# Altium PCB otis_v3.PcbDoc
Units mil, origin at the board's own origin, x right, y up, seen from the top; angles counter-clockwise.
Board outline 2155 x 1100 mil, 2 copper layers (Top Layer, Bottom Layer); 16 components, 20 nets, 111 pads, 26 vias.
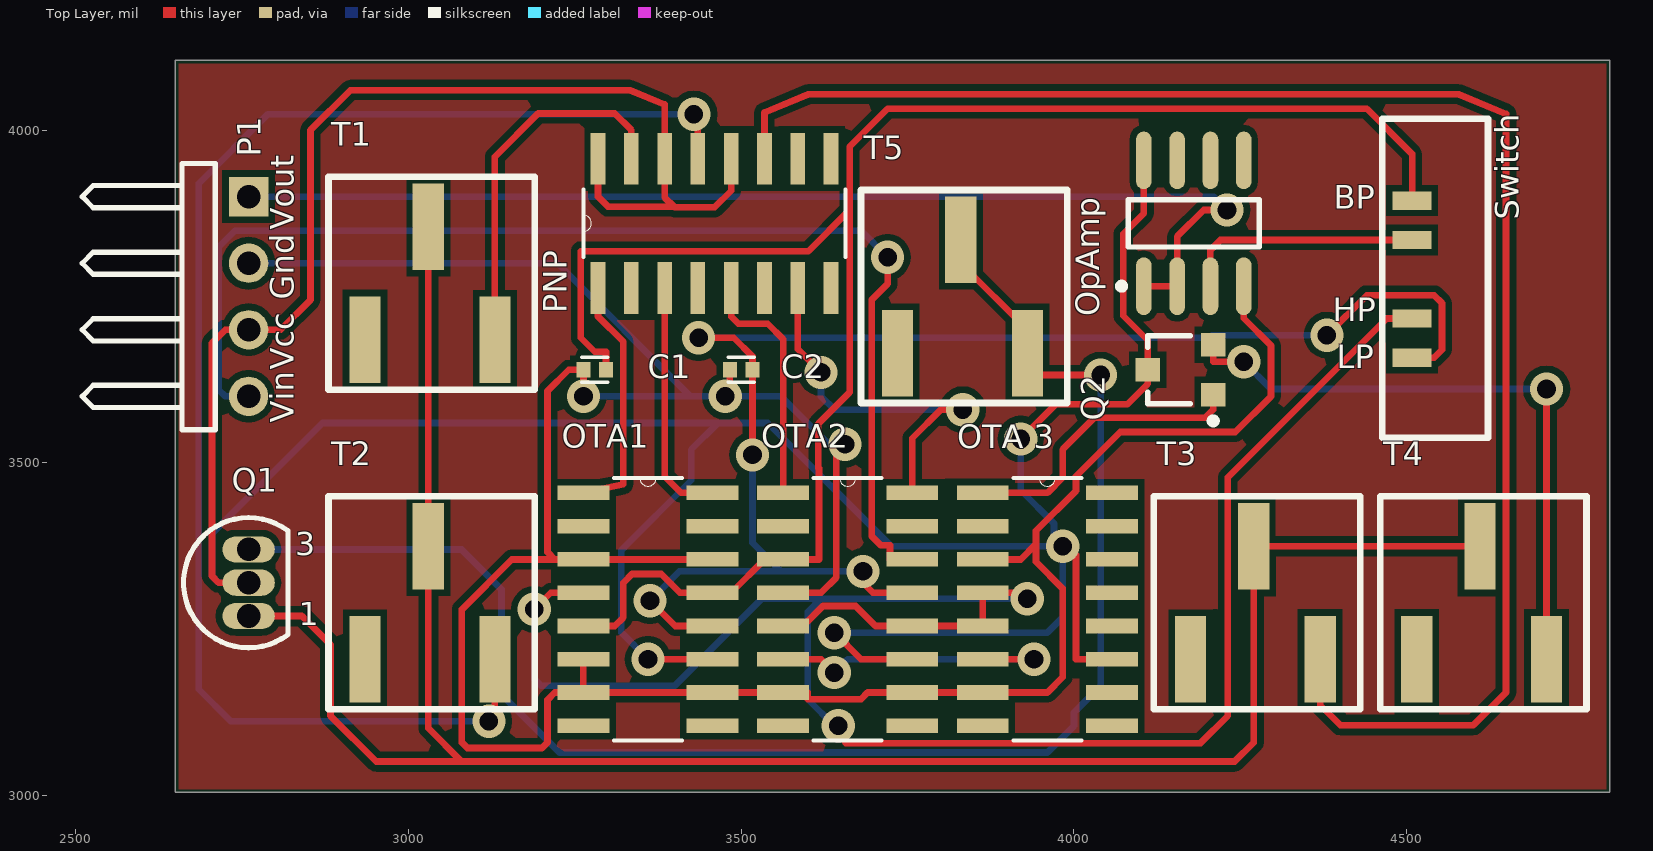
[diagram p0: Top Layer view]
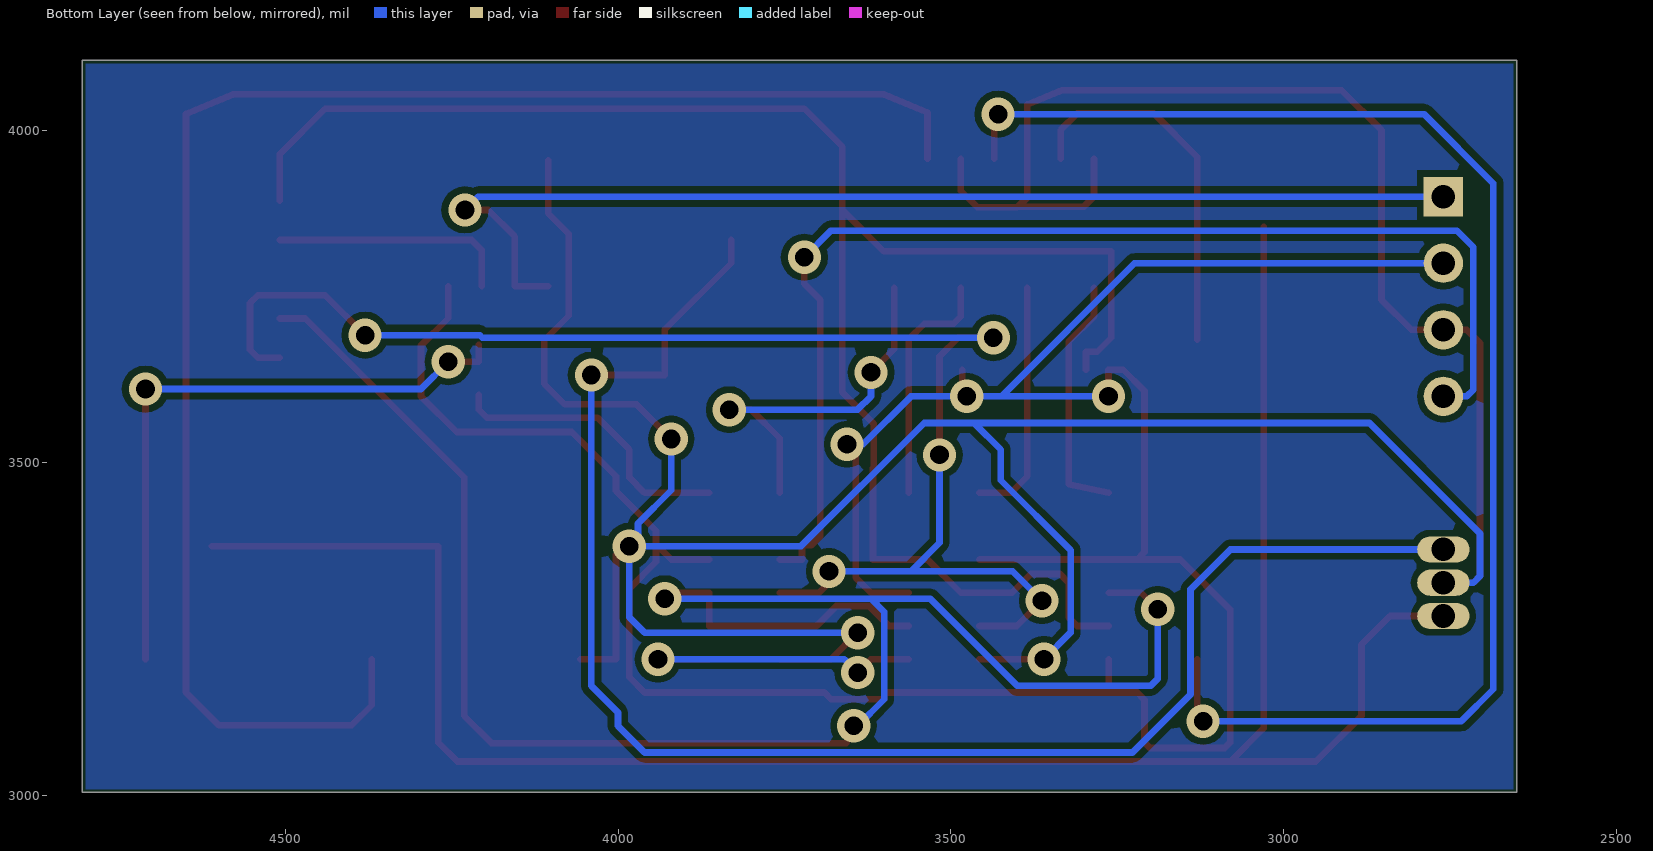
[diagram p1: Bottom Layer view, seen from below]

## Layer stack, top to bottom
Top Layer: signal copper 1.4
Dielectric: dielectric 12.6, FR-4, Dk 4.8
Bottom Layer: signal copper 1.4

## Board outline
2650,4105 4805,4105 4805,3005 2650,3005

## Design rules (kind name [scope] priority, off if disabled: settings)
Clearance [All] p1: gap=10
ComponentClearance [All] p1: gap=10 collisioncheckmode=3 verticalgap=10
PolygonConnect [All] p1: connectstyle=Relief reliefconductorwidth=10 reliefentries=4 polygonreliefangle="90 Angle"
RoutingVias [All] p1: holewidth=28 width=50 viastyle="Through Hole" minholewidth=28 minwidth=50 maxholewidth=28 maxwidth=50
SolderMaskExpansion [All] p1: expansion=4
TestPointUsage [All] p1: valid=0 allowmultiple=FALSE
Testpoint [All] p1: side=15 testpointundercomponent=TRUE minsize=40 maxsize=100 preferedsize=60 minholesize=0 maxholesize=40 preferedholesize=32 testpointgrid=1 style=1023 order=0-112345678
Width [All] p1: maxlimit=10 minlimit=10 preferedwidth=10
18 further rules are at their usual default settings.

## Components (designator, comment, footprint, x,y, rotation, side; value= is the part's Value field where it differs from the comment)
C1 "2pF" _C*CAPC1005X55N_CC0402C100K5GACAUTO_CPrimary_C 3280,3640 r0 top
C2 "2pF" _C*CAPC1005X55N_CC0402C100K5GACAUTO_CPrimary_C 3500,3640 r0 top
OpAmp "LF153D" SO8_N 4180,3860 r90 top (schematic designator U4)
OTA1 "LM13700M" LM13700LM13700MLM13700LM13700MLM13700PrimaryLM13700 3360,3280 r0 top
OTA2 "LM13700M" LM13700LM13700MLM13700LM13700MLM13700PrimaryLM13700 3660,3280 r0 top
"OTA 3" "LM13700M" LM13700LM13700MLM13700LM13700MLM13700PrimaryLM13700 3960,3280 r0 top
P1 "Header 4H" HDR1X4H 2760,3900 r270 top
PNP "MMPQ3906" LM13700LM13700MLM13700LM13700MLM13700PrimaryLM13700 3460,3860 r90 top
Q1 "2N3906" TO-92A 2760,3320 r0 top
Q2 "PNP" SOT-23B 4160,3640 r90 top
T1 "" PCBComponent_1#1 17400,31760 r0 top
T2 "" PCBComponent_1#1 17400,31280 r0 top
T3 "" PCBComponent_1#1 18640,31280 r0 top
T4 "" PCBComponent_1#1 18980,31280 r0 top
T5 "" PCBComponent_1#1 18200,31740 r0 top
? "Switch" PCBComponent_1#2 -28500,30605 r90 top

## Footprints (in the part's own frame and the unit in brackets; to place one, negate y for a bottom-side part, rotate by r counter-clockwise, add the part's x,y. Pads: shape width x height; smd on the part's side, far side on the other; paste and mask are expansions set on the pad)
_C*CAPC1005X55N_CC0402C100K5GACAUTO_CPrimary_C [mm]
  rect 0.54x0.6 smd: 1(-0.43,0) 2(0.43,0)
  silkscreen extent -0.5,-0.48 0.5,0.48
HDR1X4H [mm] "Connector; Header; 4 Position; Right Angle"
  rect 1.5x1.5 hole 0.9: 1(0,0)
  round 1.5 hole 0.9: 2(2.54,0) 3(5.08,0) 4(7.62,0)
  silkscreen extent -1.27,-6.35 8.89,-1.27
LM13700LM13700MLM13700LM13700MLM13700PrimaryLM13700 [mil]
  rect 78x22 smd: 1(-97,175) 2(-97,125) 3(-97,75) 4(-97,25) 5(-97,-25) 6(-97,-75) 7(-97,-125) 8(-97,-175) 9(97,-175) 10(97,-125) 11(97,-75) 12(97,-25) 13(97,25) 14(97,75) 15(97,125) 16(97,175)
  silkscreen extent -51,-197 51,197
PCBComponent_1#1 [mm]
  rect 1.19x3.3 smd: 1(-364.998,-708.787) 2(-367.411,-713.105) 3(-362.458,-713.105)
  silkscreen extent -368.81,-715.01 -360.93,-706.88
PCBComponent_1#2 [mm]
  rect 0.7x1.5 smd: 1(-684.454,-838.403) 2(-682.955,-838.403) 3(-679.958,-838.403) 4(-678.459,-838.403)
  round 0.9 on Top Solder: 8(-683.971,-840.054) 9(-678.942,-840.054)
  rect 1x0.8 on Top Paste: MP1(-686.587,-839.089) MP2(-686.587,-840.537) MP3(-676.25,-839.089) MP4(-676.25,-840.537)
  silkscreen extent -687.5,-841.3 -675.34,-837.26
SO8_N [mm] "SOIC, 8-Leads, Body 4.9x3.9mm, Pitch 1.27mm, IPC Medium Density"
  oval 2.2x0.6 smd: 1(-2.4,1.905) 2(-2.4,0.635) 3(-2.4,-0.635) 4(-2.4,-1.905) 5(2.4,-1.905) 6(2.4,-0.635) 7(2.4,0.635) 8(2.4,1.905)
  silkscreen extent -2.52,-2.5 0.9,2.88, body extent -1.95,-2.45 1.95,2.45, height 1.75
SOT-23B [mm] "SOT-23; 3 Leads; Body 3.0 x 2.6 mm, inc. leads (LxW max)"
  rect 0.9x0.95 smd: 1(-0.95,-1.25) 2(0.95,-1.25) 3(0,1.25)
  silkscreen extent -2.07,-1.38 1.3,1.25
TO-92A [mm] "TO, Flat Index; 3 In-Line, Axial Leads; Body Dia. 4.5mm; Leads 0.51 x 0.48 mm (max)"
  oval 2x1 hole 0.9: 1(0,-1.27) 2(0,0) 3(0,1.27)
  silkscreen extent -2.48,-2.48 1.5,2.48

## Part data
C1 C2: library part C0402C100K5GACAUTO, "CAPACITOR CERAMIC 10 PF 10% TOL 50V C0G 0402"
OpAmp: "Wide-Bandwidth Dual J-FET Operational Amplifier"
OTA1 OTA2 "OTA 3": "Dual Operational Transconductance Amplifier with Linearizing Diodes and Buffers 16-SOIC 0 to 70"
P1: "Header, 4-Pin, Right Angle"
PNP: library part LM13700M, "Dual Operational Transconductance Amplifier with Linearizing Diodes and Buffers 16-SOIC 0 to 70"
Q1: "PNP General Purpose Amplifier"
Q2: "PNP Bipolar Transistor"
T1 T2 T3 T4 T5 ?: library part Component_1

## Via types
v1: diameter 50, hole 28, Top Layer to Bottom Layer, 26 vias

## Nets (pads, with @x,y where several pads share a name; then routed paths per layer and width w, separated by ;. In a path a pad name is that pad's centre, name@x,y a point inside that pad or via, vN(x,y) a via of type N, cw(c..) or ccw(c..) an arc to the next point about the centre after c; other vN are vias at no path point)
BP: ?.4 C1.2 OTA1.5 OTA1.13 OTA2.3 | length 2689.6
  Top Layer w10: OTA1.5 3310,3255 3323,3268 3323,3320 3336,3333 3380,3333 3408,3305 OTA1.13 3485,3305 3535,3355 OTA2.3 3617,3355 3617,3492 3616,3492 3616,3559 3663,3606 3663,3880 ; C1.2 3296.93,3667 3280,3667 3259,3688 3259,3818 3601,3818 3663,3880 ; ?.4 4508,3964 4440,4032 3720,4032 3663,3975 3663,3880
COM: ?.3 OpAmp.3 | length 363.7
  Top Layer w10: OpAmp.3 4205,3820 4220,3835 ?.3
GND: "OTA 3.3" "OTA 3.7" C1.1 C2.1 OpAmp.4 OTA1.3 OTA1.6 OTA1.7 OTA1.10 OTA1.14 OTA2.4 OTA2.7 OTA2.10 P1.2 | length 4489.9
  Top Layer w10: OTA1.6 OTA1.7 ; v1(3263.07,3600) C1.1 3241,3640 3209,3608 3209,3366 3220,3355 ; OTA1.14 OTA1.3 3220,3355 ; v1(3476,3600) 3483.07,3607.07 C2.1 ; OTA2.4 3620,3305 3643,3328 3643,3515 v1(3656,3528) ; 3863,3355 3920,3355 3943,3378 ; OpAmp.4 4255,3717.25 4295.91,3676.34 4295.91,3600 4242.41,3546.5 4069.5,3546.5 4003,3480 4003,3458 3943,3398 3943,3378 ; 3220,3355 3155.31,3355 3080.31,3280 3080.31,3080 3088.64,3071.67 3200.67,3071.67 3209,3080 3209,3144 3220,3155 OTA1.7 ; OTA1.7 OTA1.10 OTA2.7 3600,3155 3600,3145 3680,3145 3690,3155 OTA2.10 3863,3155 3960,3155 3983,3178 3983,3311.56 3943,3351.56 3943,3378
  Bottom Layer w10: P1.2 3224,3800 3424,3600 ; v1(3263.07,3600) 3424,3600 ; v1(3656,3528) 3632,3528 3560,3600 v1(3476,3600) 3424,3600
HP: "OTA 3.4" "OTA 3.5" ?.2 OTA1.4 OTA2.5 OTA2.12 | length 3008.9
  Top Layer w10: v1(3189,3280) 3214,3305 OTA1.4 ; OTA2.5 3593,3255 3623,3285 3672,3285 3702,3255 OTA2.12 3863,3255 3863,3305 3921.08,3305 v1(3930,3296.08) ; v1(3646,3105) 3657,3079 4190,3079 4231,3120 4231,3478 4470,3717 ?.2
  Bottom Layer w10: v1(3189,3280) 3189,3176 3200,3165 3400,3165 3531.08,3296.08 3620,3296.08 ; v1(3646,3105) 3640,3105 3600,3145 3600,3276.08 3620,3296.08 ; v1(3930,3296.08) 3620,3296.08
LP: ?.1 C2.2 OTA1.12 OTA2.13 | length 2247
  Top Layer w10: v1(3363,3293) 3401,3255 OTA1.12 ; v1(3436,3688) 3488.93,3688 3516.93,3660 C2.2 v1(3516.93,3512) ; v1(3683,3337) 3683,3320 3698,3305 OTA2.13 ; v1(4380,3692) 4440,3752 4541,3752 4553,3740 4553,3670 4541,3658 ?.1
  Bottom Layer w10: v1(3363,3293) 3407,3337 3560,3337 ; v1(3436,3688) 4204,3688 4208,3692 v1(4380,3692) ; v1(3516.93,3512) 3516.93,3380.07 3560,3337 ; v1(3683,3337) 3560,3337
NetOpAmp_1: OpAmp.1 OpAmp.2 P1.1 | length 1694.3
  Top Layer w10: OpAmp.1 OpAmp.2 4155,3840 4195,3880 v1(4230,3880)
  Bottom Layer w10: P1.1 4210,3900 v1(4230,3880)
NetOTA1_1: OTA1.1 PNP.1 | length 372.1
  Top Layer w10: OTA1.1 3323,3468 3323,3682 3285,3720 PNP.1
NetOTA1_16: OTA1.16 PNP.3 | length 365.4
  Top Layer w10: PNP.3 3385,3480 3410,3455 OTA1.16
NetOTA2_1: OTA2.1 PNP.5 | length 366.1
  Top Layer w10: PNP.5 3485,3720 3496,3709 3540,3709 3563,3686 OTA2.1
NetOTA2_6: "OTA 3.6" OTA2.6 | length 470.6
  Top Layer w10: OTA2.6 3620,3205 v1(3640,3185) ; 3863,3205 v1(3940,3205)
  Bottom Layer w10: v1(3640,3185) 3660,3205 v1(3940,3205)
NetOTA2_16: OTA2.16 PNP.7 | length 574.6
  Top Layer w10: PNP.7 3585,3671 v1(3620,3636) ; OTA2.16 3757,3537 3800,3580 v1(3833,3580)
  Bottom Layer w10: v1(3620,3636) 3620,3600 3640,3580 v1(3833,3580)
"NetOTA 3_1": "OTA 3.1" Q2.1 | length 445.2
  Top Layer w10: 3863,3455 3960,3455 3983,3478 3983,3520 4031,3568 4197.21,3568 4209.21,3580 Q2.1
NetPNP_11: PNP.11 T3.3 | length 2444.9
  Top Layer w10: PNP.11 3535,4026.49 3601.13,4053.88 4577.88,4053.88 4649,4024.41 4649,3155 4600,3106 4400,3106 4370,3136 T3.3
NetPNP_13: PNP.13 T2.3 | length 2169.2
  Top Layer w10: v1(3121,3112) 3130,3121 T2.3 ; v1(3429,4024) 3435,4018 PNP.13
  Bottom Layer w10: v1(3121,3112) 2733,3112 2685,3160 2685,3920 2789,4024 v1(3429,4024)
NetPNP_15: PNP.15 T1.3 | length 560.3
  Top Layer w10: T1.3 3130,3960 3195,4025 3310,4025 3335,4000 PNP.15
NetQ1_1: Q1.1 T1.1 T2.1 T3.1 T4.1 | length 3134.5
  Top Layer w10: Q1.1 2840,3270 2883,3227 2883,3120 2951.66,3051.34 3080,3051.34 ; T1.1 T2.1 3030,3101.34 3080,3051.34 ; T4.1 T3.1 4270,3080 4241.34,3051.34 3080,3051.34
NetQ1_3: Q1.3 T5.1 T5.3 | length 2373.4
  Top Layer w10: T5.1 3830,3800 3930,3700 T5.3 3930,3632 v1(4040,3632)
  Bottom Layer w10: Q1.3 3080,3370 3140,3310 3140,3152.04 3227.04,3065 3960,3065 4000,3105 4000,3125 4040,3165 v1(4040,3632)
NetQ2_2: Q2.2 T4.3 | length 949.2
  Top Layer w10: Q2.2 4209.21,3652 v1(4255,3652) ; T4.3 v1(4710,3611)
  Bottom Layer w10: v1(4255,3652) 4296,3611 v1(4710,3611)
VCC: "OTA 3.11" OpAmp.8 OTA1.11 OTA2.11 P1.3 PNP.12 PNP.14 PNP.16 Q1.2 Q2.3 | length 5562
  Top Layer w10: Q1.2 2715,3320 2705,3330 2705,3680 2725,3700 P1.3 2808,3700 2853,3745 2853,4000 2913,4060 3333,4060 3385,4038.46 PNP.14 3385,3899 3399,3885 ; PNP.16 3285,3900 3300,3885 3399,3885 ; v1(3360,3205) OTA1.11 ; PNP.12 3485,3909 3460,3884 3400,3884 3399,3885 ; v1(3640,3245) 3680,3205 OTA2.11 ; v1(3920,3536) 3972,3588 4080,3588 4110.79,3618.79 Q2.3 4110.79,3684.21 4074,3721 4074,3844 4105,3875 OpAmp.8 ; v1(3983,3375) 3990,3375 4003,3362 4003,3205 4057,3205
  Bottom Layer w10: Q1.2 2715,3320 2705,3330 2705,3394 2871,3560 3465,3560 ; v1(3360,3205) 3320,3245 3320,3369 3425,3474 3425,3520 3465,3560 ; v1(3640,3245) 3960,3245 3983,3268 v1(3983,3375) ; v1(3920,3536) 3920,3459 3970,3409 3970,3388 v1(3983,3375) ; 3465,3560 3540,3560 3725,3375 v1(3983,3375)
VIN: OTA2.14 P1.4 | length 1811.9
  Top Layer w10: v1(3720,3809) 3720,3769 3696,3745 3696,3390 3709.92,3376.08 3723.51,3376.08 3723.51,3355 OTA2.14
  Bottom Layer w10: P1.4 2725,3600 2715,3610 2715,3824 2740,3849 3680,3849 v1(3720,3809)
pads on no net: "OTA 3.2" "OTA 3.8" "OTA 3.9" "OTA 3.10" "OTA 3.12" "OTA 3.13" "OTA 3.14" "OTA 3.15" "OTA 3.16" ?.8 ?.9 ?.MP1 ?.MP2 ?.MP3 ?.MP4 OpAmp.5 OpAmp.6 OpAmp.7 OTA1.2 OTA1.8 OTA1.9 OTA1.15 OTA2.2 OTA2.8 OTA2.9 OTA2.15 PNP.2 PNP.4 PNP.6 PNP.8 PNP.9 PNP.10 T1.2 T2.2 T3.2 T4.2 T5.2

## Polygon pours and split planes (outlines as drawn)
no net on Top Layer "gnd" (solid, pour order 1000): 2665.05,4100 4800,4100 4800,3010 2655,3010 2655,4100
no net on Bottom Layer "gnd" (solid, pour order 1001): 2655,4100 4800,4100 4800,3010 2655,3010

## Silkscreen, mask and mechanical layers (free items; w line width, h text height)
Top Overlay:
  text "BP" at 4390,3870 h60
  text "Switch" at 4680,3865 h60 r90
  text "Vout" at 2840,3850 h60 r90
  text "Gnd" at 2840,3745 h60 r90
  text "HP" at 4388.51,3700.51 h60
  text "Vcc" at 2840,3640 h60 r90
  text "LP" at 4395,3630 h60
  text "Vin" at 2840,3560 h60 r90

## Text inside footprints (layer, text, board x,y; h text height)
Q1: Top Overlay "3" at 2830,3350 h59.05; Top Overlay "1" at 2835,3245 h59.05